# Altium PCB PWM Buck SW.PcbDoc
Units mm, origin at the board's own origin, x right, y up, seen from the top; angles counter-clockwise.
Board outline 156.03 x 124.28 mm, 2 copper layers (Top Layer, Bottom Layer); 37 components, 29 nets, 112 pads, 0 vias.
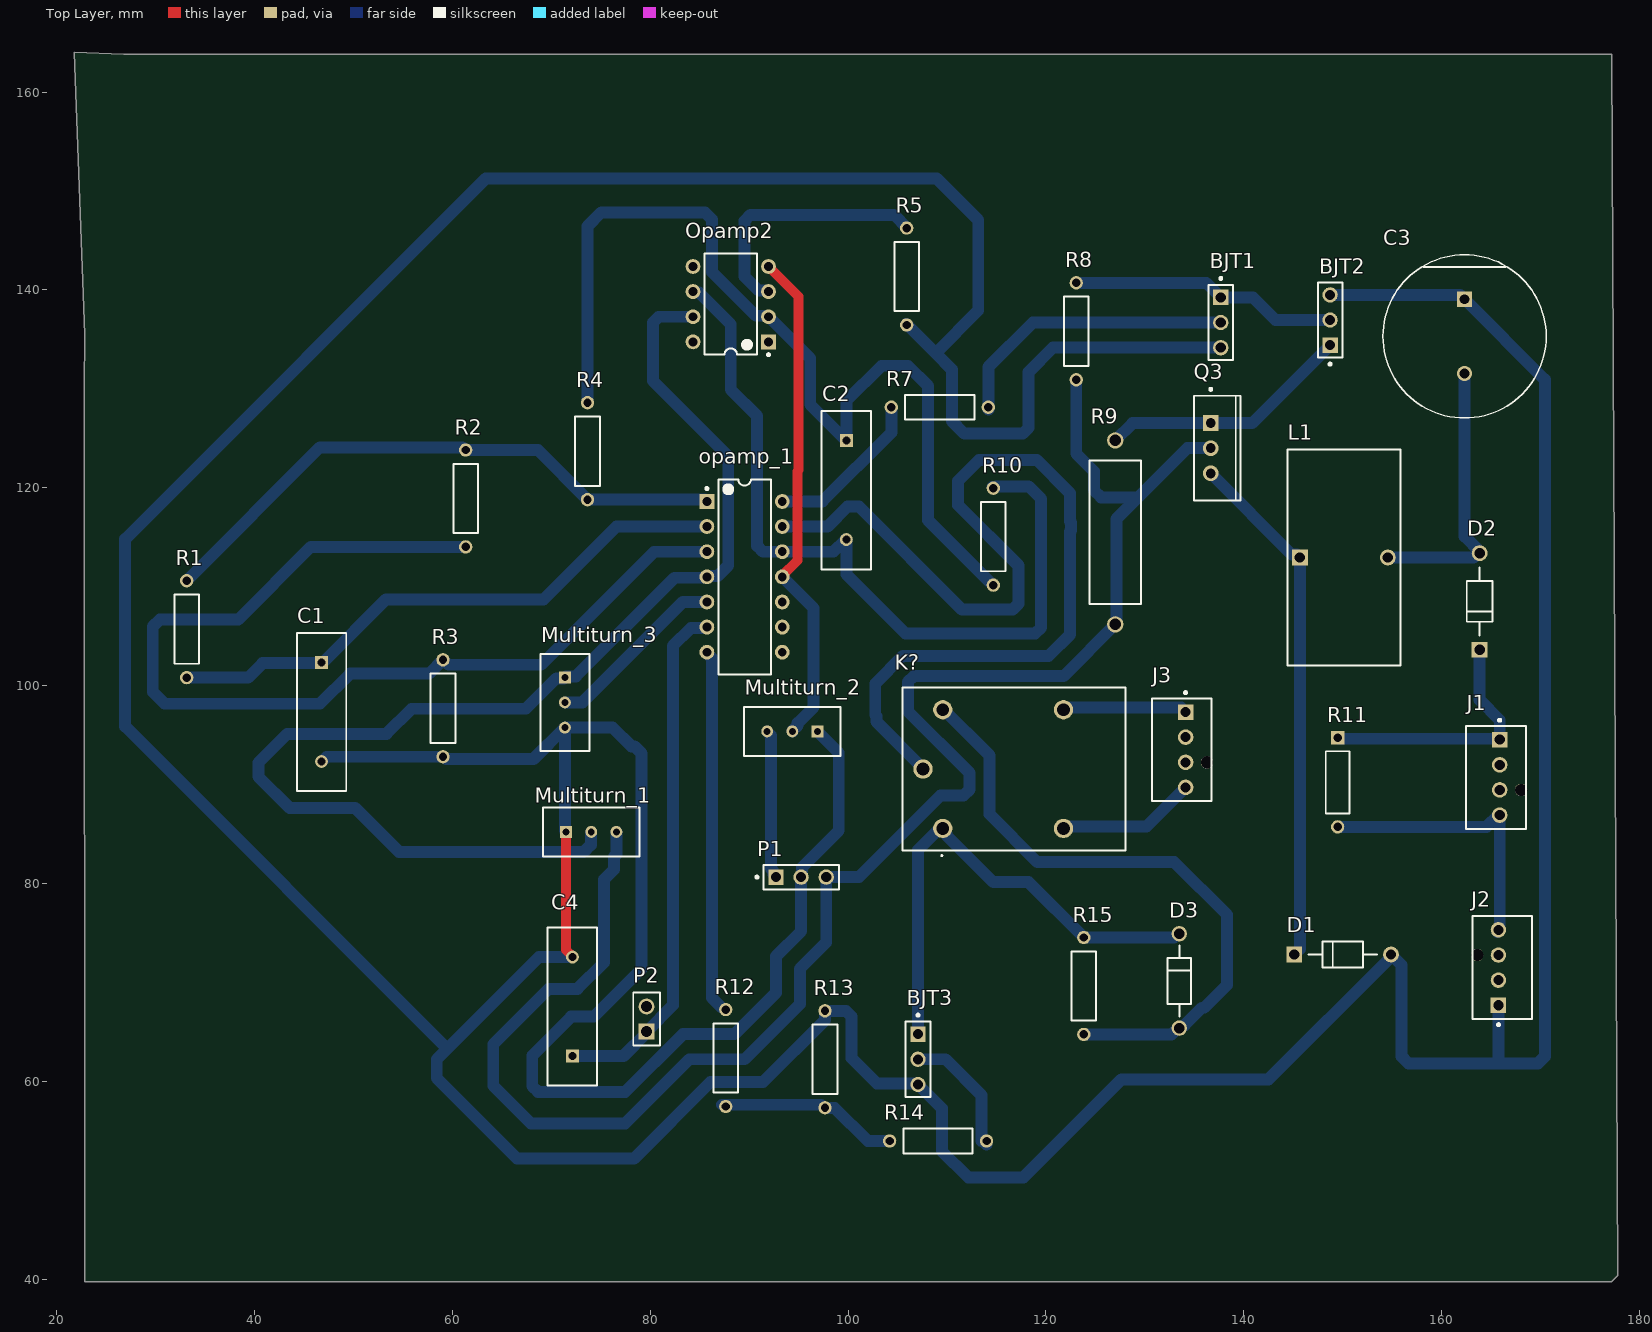
[diagram p0: Top Layer view]
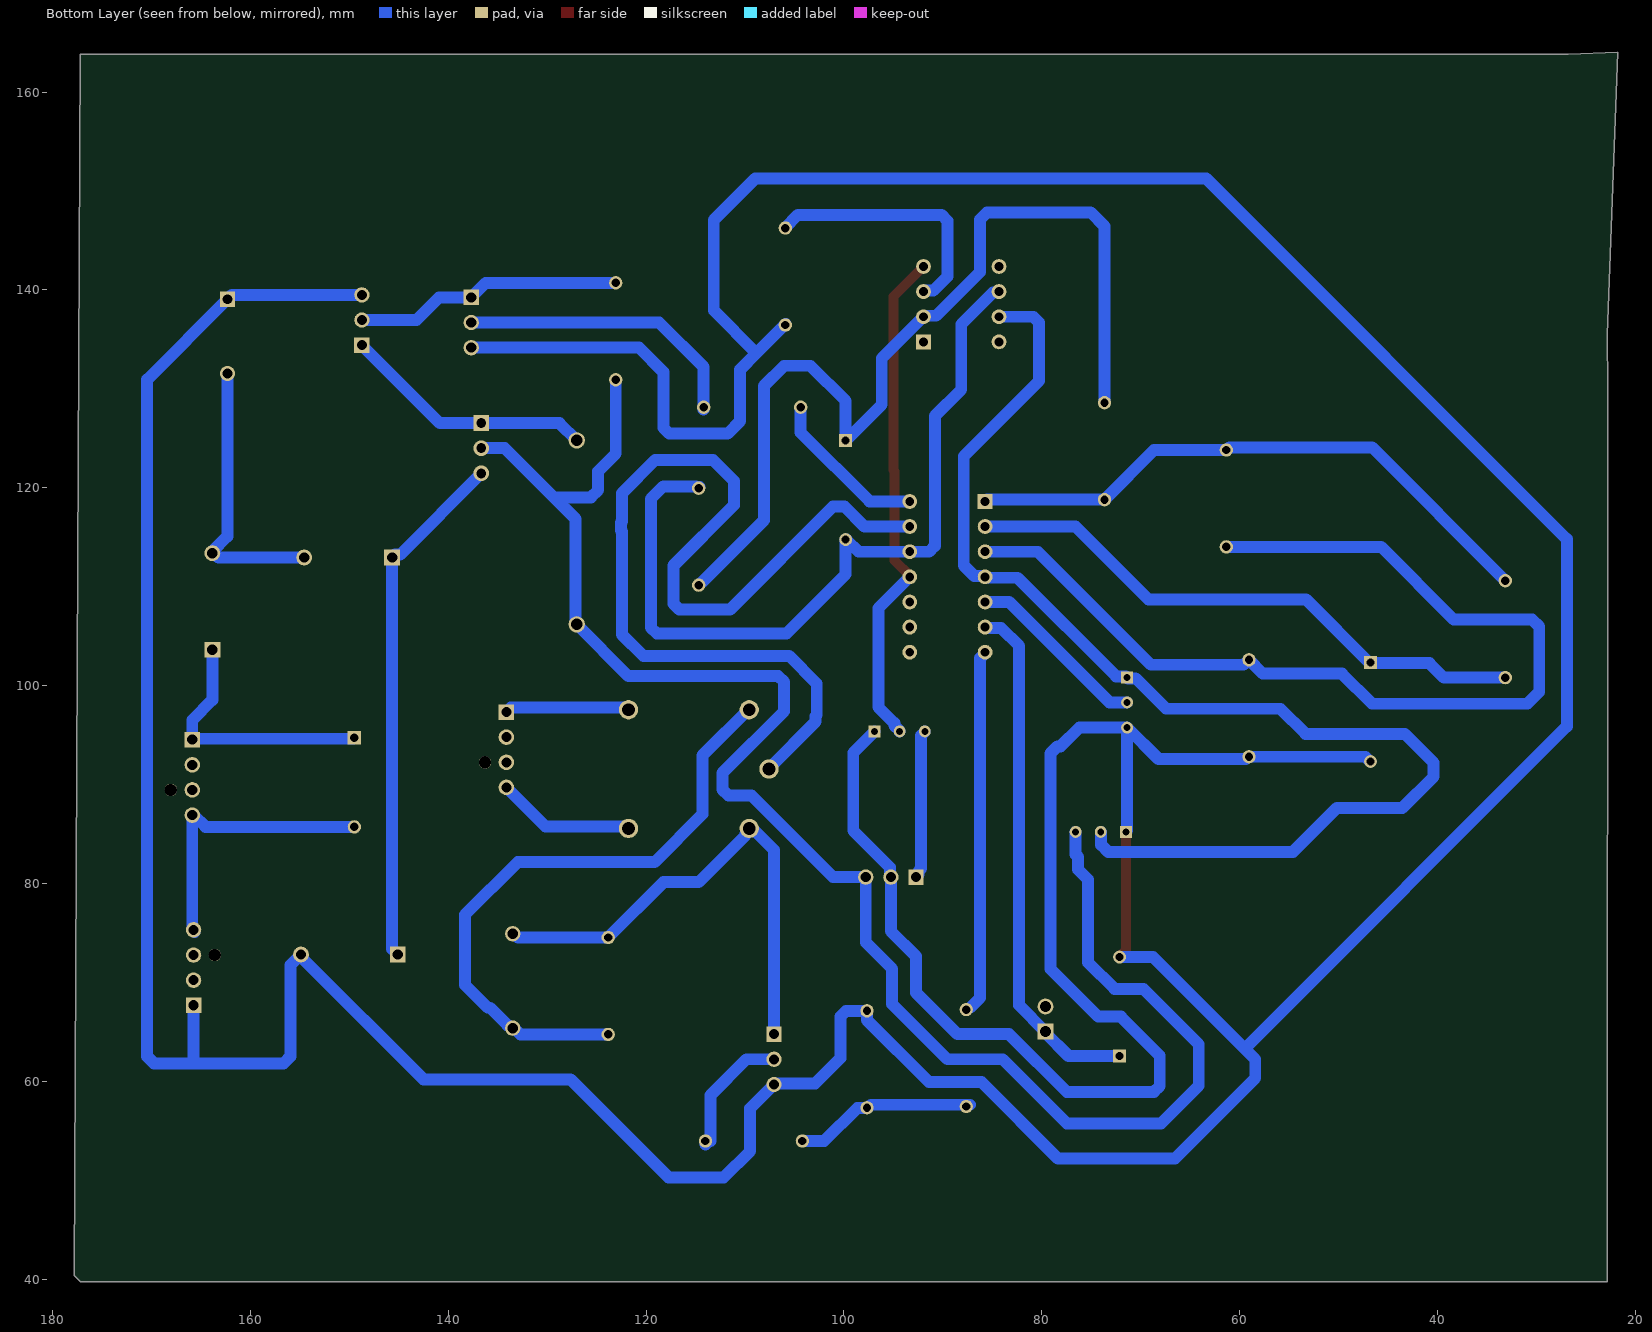
[diagram p1: Bottom Layer view, seen from below]
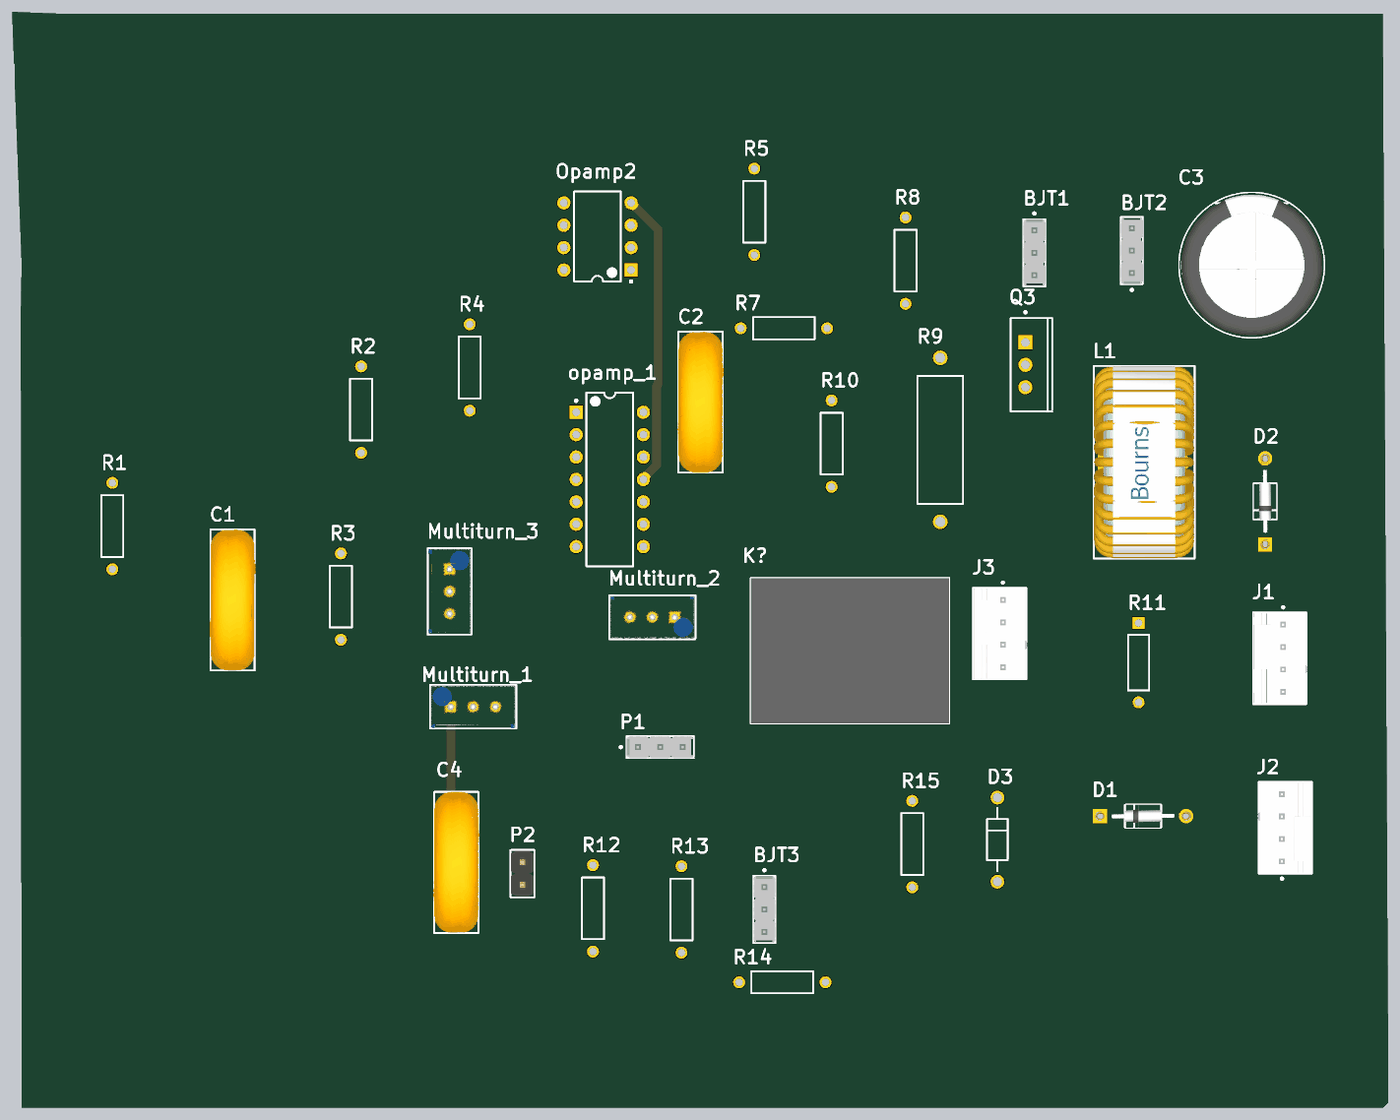
[diagram p2: 3D render of the assembled board from above, using the file's embedded part models]

## Layer stack, top to bottom
Top Solder: solder mask 0.0102, Solder Resist, Dk 3.5
Top Layer: signal copper 0.0356
Dielectric 1: dielectric 0.32, FR-4, Dk 4.8
Bottom Layer: signal copper 0.0356
Bottom Solder: solder mask 0.0102, Solder Resist, Dk 3.5

## Board outline
22.77,130.085 22.86,135.471 21.774,164.027 26.797,163.83 177.165,163.83 177.8,40.386 177.165,39.751 22.86,39.751

## Design rules (kind name [scope] priority, off if disabled: settings)
Clearance [All] p1: gap=0 ignorepadtopadclearanceinfootprint=FALSE
PolygonConnect [All] p1: connectstyle=Relief reliefconductorwidth=0.254 reliefentries=4 polygonreliefangle="90 Angle" airgapwidth=0.254
RoutingVias [All] p1: holewidth=0.711 width=1.27 viastyle="Through Hole" minholewidth=0.711 minwidth=1.27 maxholewidth=0.711 maxwidth=1.27
SolderMaskExpansion [All] p1: expansion=0.102 istentingtop=FALSE
Width [All] p1: maxlimit=1 minlimit=1 preferedwidth=1 minimp=50.000000 maximp=50.000000 favimp=50.000000
30 further rules are at their usual default settings.

## Components (designator, comment, footprint, x,y, rotation, side; value= is the part's Value field where it differs from the comment)
BJT1 "22-28-4033" MOLX-22-28-4033_V 137.668,136.7 r270 top
BJT2 "22-28-4033" MOLX-22-28-4033_V 148.717,136.954 r90 top
BJT3 "22-28-4033" MOLX-22-28-4033_V 107.061,62.23 r270 top
C1 "10nF" FP-VY1472M63Y5UQ6TV0-MFG 46.774,97.329 r270 top
C2 "10nF" FP-VY1472M63Y5UQ6TV0-MFG 99.822,119.761 r270 top
C3 "100 u" FP-RAD-TH-D_16_0_5-L_25_2-MFG 162.306,135.303 r270 top
C4 "10nF" FP-VY1472M63Y5UQ6TV0-MFG 72.136,67.564 r90 top
D1 "" FP-6_561-5001_02-4-MFG 149.987,72.819 r0 top
D2 "" FP-6_561-5001_02-4-MFG 163.83,108.506 r90 top
D3 "1N4001" ONSC-AXIAL_LEAD-2-59-10_P 133.477,70.152 r270 top
J1 "" FP-47053-3000-MFG 165.482,90.726 r90 top
J2 "" FP-47053-3000-MFG 166.115,71.501 r270 top
J3 "" FP-47053-3000-MFG 133.732,93.52 r90 top
K? "T7NS5D4-24" T7NS5D424 109.569,85.567 r0 top
L1 "2114-V-RC" FP-2114-V-RC-MFG 150.114,112.951 r90 top value=150uH
Multiturn_1 "" FP-3296W-MFG 74.041,85.222 r270 top
Multiturn_2 "" FP-3296W-MFG 94.361,95.372 r90 top
Multiturn_3 "" FP-3296W-MFG 71.379,98.298 r180 top
Opamp2 "UA741CP" P0008A 88.138,138.557 r180 top
opamp_1 "LM324N" N0014A 89.535,110.998 r0 top
P1 "22-28-4033" MOLX-22-28-4033_V 95.25,80.645 r0 top
P2 "" 61300211121 79.629,66.294 r90 top
Q3 "IRFB31N20DPBF" INTR-TO-220AB-3 136.652,124 r0 top
R1 "33k" OMTE-RES7X2.5-2 33.147,105.712 r270 top
R2 "33k" OMTE-RES7X2.5-2 61.341,118.92 r270 top
R3 "33k" OMTE-RES7X2.5-2 59.055,97.711 r270 top
R4 "1.2k" OMTE-RES7X2.5-2 73.66,123.698 r270 top
R5 "OD103JE" OMTE-RES7X2.5-2 105.918,141.351 r270 top
R7 "1 k" OMTE-RES7X2.5-2 109.273,128.143 r0 top
R8 "1 k" OMTE-RES7X2.5-2 123.063,135.811 r270 top
R9 "1.2K" RESA90-1450X520 127,115.491 r270 top
R10 "33k" OMTE-RES7X2.5-2 114.681,115.062 r90 top
R11 "1K" RESA60-630X240 149.479,90.218 r270 top
R12 "10 K" OMTE-RES7X2.5-2 87.63,62.357 r90 top
R13 "10 K" OMTE-RES7X2.5-2 97.663,62.23 r270 top
R14 "1 k" OMTE-RES7X2.5-2 109.093,53.975 r0 top
R15 "10 k" OMTE-RES7X2.5-2 123.825,69.644 r270 top

## Footprints (in the part's own frame and the unit in brackets; to place one, negate y for a bottom-side part, rotate by r counter-clockwise, add the part's x,y. Pads: shape width x height; smd on the part's side, far side on the other; paste and mask are expansions set on the pad)
61300211121 [mm] "Pin Header, pitch 2.54 mm, THT, Vertical, single row, 2p"
  rect 1.6x1.6 hole 1.1: 1(-1.27,0)
  round 1.6 hole 1.1: 2(1.27,0)
  silkscreen extent -2.69,-1.35 2.69,1.35, body extent -2.54,-1.27 2.54,1.27, height 8.57
FP-6_561-5001_02-4-MFG [mm]
  rect 1.6x1.6 hole 1.05 paste-1000 mask+0: 1(-4.888,0)
  round 1.6 hole 1.05 paste-1000 mask+0: 2(4.888,0)
  silkscreen extent -3.45,-1.3 3.45,1.3, body extent -5.79,-1.4 5.79,1.4, height 0.25
FP-2114-V-RC-MFG [mm]
  rect 1.6x1.6 hole 1.05 paste-1000 mask+0: 1(0,4.445)
  round 1.6 hole 1.05 paste-1000 mask+0: 2(0,-4.445)
  silkscreen extent -10.92,-5.72 10.92,5.72, body extent -11.02,-5.81 11.02,5.81, height 0.25
FP-3296W-MFG [mm]
  rect 1.2x1.2 hole 0.7 paste-1000 mask+0: 1(0.005,-2.54)
  round 1.2 hole 0.7 paste-1000 mask+0: 2(0.005,0) 3(0.005,2.54)
  silkscreen extent -2.48,-4.89 2.48,4.89, body extent -2.58,-4.99 2.58,4.99, height 0.25
FP-47053-3000-MFG [mm]
  rect 1.57x1.57 hole 1.02 paste-1000 mask+0: 1(3.81,-0.38)
  round 1.57 hole 1.02 paste-1000 mask+0: 2(1.27,-0.38) 3(-1.27,-0.38) 4(-3.81,-0.38)
  round 1.25 hole 1.25 unplated paste-1000 mask+0: ""(-1.27,-2.54)
  silkscreen extent -5.2,-3.02 5.9,3.02, body extent -5.3,-3.26 5.3,3.12, height 0.25
FP-RAD-TH-D_16_0_5-L_25_2-MFG [mm]
  rect 1.55x1.55 hole 1 paste-1000 mask+0: 1(-3.75,0)
  round 1.55 hole 1 paste-1000 mask+0: 2(3.75,0)
  silkscreen extent -8.25,-8.25 8.25,8.25, body extent -8.35,-8.35 8.35,8.35, height 0.25
FP-VY1472M63Y5UQ6TV0-MFG [mm]
  rect 1.3x1.3 hole 0.8 paste-1000 mask+0: 1(-5,0)
  round 1.3 hole 0.8 paste-1000 mask+0: 2(5,0)
  silkscreen extent -8,-2.5 8,2.5, body extent -8.1,-2.6 8.1,2.6, height 0.25
INTR-TO-220AB-3 [mm] "FM, 3-Leads, Body 10.55x4.7mm, Pitch 2.54mm"
  rect 1.6x1.6 hole 1: 1(0,2.54)
  round 1.6 hole 1: 2(0,0) 3(0,-2.54)
  silkscreen extent -1.67,-5.3 3.03,6.07, body extent -1.67,-5.28 3.03,5.28, height 19.3
MOLX-22-28-4033_V [mm] "THD, 3-Leads, Body 7.62x2.49mm, Pitch 2.54mm"
  rect 1.55x1.55 hole 1.02: 1(-2.54,0)
  round 1.55 hole 1.02: 2(0,0) 3(2.54,0)
  silkscreen extent -4.58,-1.24 3.81,1.24, body extent -3.81,-1.24 3.81,1.24, height 8.38
N0014A [mm] "DIP, 14-Leads, Body 19.7x6.6mm, Pitch 2.54mm"
  rect 1.5x1.5 hole 0.9: 1(-3.81,7.62)
  round 1.5 hole 0.9: 2(-3.81,5.08) 3(-3.81,2.54) 4(-3.81,0) 5(-3.81,-2.54) 6(-3.81,-5.08) 7(-3.81,-7.62) 8(3.81,-7.62) 9(3.81,-5.08) 10(3.81,-2.54) 11(3.81,0) 12(3.81,2.54) 13(3.81,5.08) 14(3.81,7.62)
  silkscreen extent -3.93,-9.85 2.65,9.85, body extent -3.95,-9.85 3.95,9.85, height 5.08
OMTE-RES7X2.5-2 [mm] "Resistor, Axial; Body 7x2.5mm, Lead Dia. 0.6mm"
  round 1.35 hole 0.85: 1(-4.9,0) 2(4.9,0)
  silkscreen extent -3.5,-1.25 3.5,1.25, body extent -3.5,-1.25 3.5,1.25, height 2.5
ONSC-AXIAL_LEAD-2-59-10_P [mm] "AXIAL, 2-Leads, Diameter 2.35mm"
  round 1.55 hole 1.05: 1(-4.77,0) 2(4.77,0)
  silkscreen extent -3.59,-1.17 3.59,1.17
P0008A [mm] "DIP, 8-Leads, Body 10.15x6.6mm, Pitch 2.54mm"
  rect 1.5x1.5 hole 0.9: 1(-3.81,3.81)
  round 1.5 hole 0.9: 2(-3.81,1.27) 3(-3.81,-1.27) 4(-3.81,-3.81) 5(3.81,-3.81) 6(3.81,-1.27) 7(3.81,1.27) 8(3.81,3.81)
  silkscreen extent -3.94,-5.1 2.65,5.23, body extent -3.95,-5.07 3.95,5.07, height 5.08
RESA60-630X240 [mm] "Axial Resistor, 2-Leads, Dia 2.4mm, Body Length 6.3mm"
  rect 1.35x1.35 hole 0.85: 1(-4.5,0)
  round 1.35 hole 0.85: 2(4.5,0)
  silkscreen extent -3.15,-1.2 3.15,1.2, body extent -3.15,-1.2 3.15,1.2, height 2.4
RESA90-1450X520 [mm] "THD, 2-Leads, Dia 5.2mm, Body Length 14.5mm"
  round 1.65 hole 1.15: 1(-9.3,0) 2(9.3,0)
  silkscreen extent -7.25,-2.6 7.25,2.6, body extent -7.25,-2.6 7.25,2.6, height 5.2
T7NS5D424 [mm]
  round 1.95 hole 1.3: 11(-2,6) 12(12.2,12) 14(12.2,0) A1(0,0) A2(0,12)
  silkscreen extent -4.05,-2.8 18.45,14.25, body extent -4.05,-2.25 18.45,14.25, height 17

## Part data
BJT1 BJT2 BJT3 P1: library part CMP-1676-00001-5, "Male Header, Pitch 2.54 mm, 1 x 3 Position, Height 8.38 mm, Tail Length 3.18 mm, RoHS, Bulk", Colour=Black, Current Rating="4 A", Manufacturer=Molex, Max Operating Temperature="75 degC", Min Operating Temperature="0 degC", Package Quantity=1, Voltage Rating="250 V", ComponentLink1Description="Manufacturer URL", ComponentLink1URL=http://www.molex.com/, ComponentLink2Description=Datasheet, ComponentLink2URL=http://www.molex.com/pdm_docs/sd/022284033_sd.pdf, Contact Finish=Gold, Contact Material=Brass, Contact Plating=Gold, DatasheetVersion="Rev. G, 01/2012", Height="8.38 mm", Lead Pitch="0.1 inch", Length="7.62 mm", Mount="Through Hole", Mounting Technology="Through Hole", PackageDescription="Male Header, Pitch 2.54 mm, 1 x 3 Position, Height 8.38 mm, Tail Length 3.18 mm", PackageReference=22-28-4033, Packaging=Bulk, Pins=3, REACH SVHC=Unknown, RoHSCompliant=true, Rows=1
C1 C2 C4: library part CMP-02417-000050-1, "CAP CER 4700PF 760VAC Y5U RADIAL", Capacitance=4.7nF, Case/Package=Radial, Dielectric=Y5U, Max Operating Temperature=125°C, Min Operating Temperature=-40°C, Package Quantity=500, Resistor Type=Ceramic, Tolerance=20%, Voltage=500V, Construction=RADIAL, Contact Plating=Tin, Depth=5mm, Diameter=16mm, Height=19mm, Height - Seated (Max)=0.787inch, Lead Diameter=0.6mm, Lead Pitch=10mm, Lead/Base Style=Kinked, Mount="Through Hole", Packaging="Tape and Reel", Radiation Hardening=No, RoHS Compliant=Yes, Series=VY1, Termination=Radial, Thickness=5mm, Voltage Rating (AC)=500V, Voltage Rating (DC)=500V
C3: library part CMP-05427-000487-1, "Aluminum Electrolytic Capacitors (Radial Lead Type) 1000uF ±20% 50V", Capacitance=1mF, Case/Package=Radial, ESR (Equivalent Series Resistance)=16mR, Max Operating Temperature=105°C, Min Operating Temperature=-40°C, Package Quantity=250, Ripple Current=3.32A, Tolerance=20%, Voltage Rating=50V, Contact Plating=Tin, Diameter=16mm, Features="General Purpose", Height=25mm, Height - Seated (Max)=0.984inch, Impedance=16mR, Lead Diameter=0.8mm, Lead Free="Lead Free", Lead Pitch=7.5mm, Length=25mm, Life (Hours)=10000Hour, Mount="Through Hole", Number of Pins=2, Packaging="Tape and Reel", Polarity=Polar, Radiation Hardening=No, REACH SVHC="No SVHC", RoHS Compliant=Yes, Series=FR, Termination="Through Hole", Voltage Rating (DC)=50V
D1 D2: library part CMP-02541-000001-1, "DIODE ZENER 15V 1.3W DO41", Manufacturer=Vishay, Manufacturer Part Number=BZX85C15-TAP, Max Junction Temp=+175°C, Max Reverse Leakage Current=0.5uA, Max Zener Voltage=15.6V, Nom Zener Voltage=15V, Package=6.561-5001.02-4, Power Dissipation=1300mW, Reverse Voltage=11V, Temperature="to +175°C", Automotive=Yes, Automotive Grade="Grade 0", Category=Diode, ComponentLink2Description=Datasheet, ComponentLink2URL=http://www.vishay.com/docs/85607/bzx85.pdf, Device Class L1="Discrete Semiconductors", Device Class L2=Diodes, Device Class L3="Zener Diodes", Digikey Description="DIODE ZENER 15V 1.3W DO41", Height=2.6mm, Lead Free=Yes, Mouser Description="Zener Diodes 15 Volt 1.3 Watt 5%", Octopart=https://octopart.com/bzx85c15-tap-vishay-55401762, RoHS=TRUE, Temperature Range High=+175°C, Zener Impedance=15Ω
D3: library part CMP-0902-00204-1, "Standard Recovery Rectifier, 2-Pin Axial_Lead, Pb-Free, Tape and Reel", Manufacturer="On Semiconductor", PartNumber=1N4001RLG, ComponentLink1Description="Manufacturer URL", ComponentLink1URL=http://www.onsemi.com/, ComponentLink2Description=Datasheet, ComponentLink2URL=http://www.onsemi.com/pub_link/Collateral/1N4001-D.PDF, ComponentLink3Description="Package Specification", ComponentLink3URL=http://www.onsemi.cn/pub_link/Collateral/59-10.PDF, DatasheetVersion="Rev. 13", IFSM Max (A)=30, IO(rec) Max (A)=1, Mounting Technology="Through Hole", PackageDescription="2-Pin, Axial Lead, Diameter 2.35 mm", PackageReference=AXIAL_LEAD-2-59-10, PackageVersion="Rev. U, 02/2005", Packing="Tape and Reel", RoHS=TRUE, Type="Standard Recovery", VRRM Max (V)=50
J1 J2 J3: library part CMP-04776-000447-1, "CONN HEADER VERT 4POS 2.54MM", Current Rating=4A, Max Operating Temperature=75°C, Min Operating Temperature=0°C, Package Quantity=12000, Voltage Rating=250V, Contact Material="Copper Alloy", Contact Plating=Tin, Gender=Male, Glow Wire Compliant=Non-compliant, Halogen Free="Low Halogen", Mount="Through Hole", Number of Circuits=4, Number of Contacts=4, Number of Positions=4, Number of Rows=1, Orientation=Straight, Packaging=Bulk, Pitch=2.54mm, REACH SVHC="No SVHC", RoHS Compliant=Yes, Series=47053, Termination="Through Hole"
K?: "Relay or Contactor", Manufacturer_Name="TE Connectivity", Datasheet Link=https://componentsearchengine.com/Datasheets/2/T7NS5D4-24.pdf, Height=16.9mm, Manufacturer_Part_Number=T7NS5D4-24
L1: library part CMP-07248-000012-1, "FIXED IND 150UH 3.4A 62 MOHM TH", Inductance=150uH, Manufacturer=Bourns, Rms Current=3.4A, Series Resistance=0.062Ω, Temperature="-55°C to +105°C", Temperature Range High=+105°C, Temperature Range Low=-55°C, Test Frequency=1kHz, Tolerance=15%, Automotive=No, Category=Ind, ComponentLink2Description=Datasheet, ComponentLink2URL=https://www.bourns.com/docs/Product-Datasheets/2100_series.pdf, Composition=Wirewound, Device Class L1="Passive Components", Device Class L2=Inductors, Device Class L3="Fixed Inductors", Digikey Description="FIXED IND 150UH 3.4A 62 MOHM TH", Height=0.86inch, Lead Free=Yes, Manufacturer Part Number=2114-V-RC, Mouser Description="Fixed Inductors 150uH 15% Vertical", Octopart=https://octopart.com/2114-v-rc-bourns-39574085, Package=2114-V-RC, RoHS=TRUE, Shielding=true
Multiturn_1 Multiturn_2 Multiturn_3: library part CMP-07234-000043-1, "TRIMMER 50K OHM 0.5W PC PIN TOP", Color=Blue, Insulation Resistance=1GR, Manufacturer Series=3296, Max Operating Temperature=125°C, Max Power Dissipation=500mW, Min Operating Temperature=-55°C, Package Quantity=50, Resistance=50kR, Resistance Law=Linear, Resistance Tolerance=10%, Resistor Type=Cermet, Temperature Coefficient=100ppm/°C, Actuator Orientation=Vertical, Actuator Type=SCREW, Contact Plating=Tin, Depth=4.83mm, Height=0.395inch, Lead Free="Lead Free", Length=9.53mm, Military Standard=Not, Mount=Panel, Number of Pins=3, Number of Terminals/Pins=3, Number of Turns=25, Packaging=Rail/Tube, Power Rating=500mW, Radiation Hardening=No, REACH SVHC="No SVHC", RoHS Compliant=Yes, Series=3296, Taper=Linear, Technology=CERMET, Terminal Finish=Tin, Termination=Pin, Tolerance=10%, Type=Potentiometer, Weight=0.03oz, Width=9.53mm
Opamp2: library part CMP-0017-00973-2, "General-Purpose Operational Amplifier, 7 to 36 V, 0 to 70 degC, 8-pin DIP (P8), Pb-Free (RoHS)", Manufacturer="Texas Instruments", Total Supply Voltage(Max)(+5V is 5, +/-5V is 10)=36, Total Supply Voltage(Min)(+5V is 5, +/-5V is 10)=7, CMRR(Min)(dB)=70, Code_JEDEC=MS-001, ComponentLink1Description="Manufacturer URL", ComponentLink1URL=http://www.ti.com/, ComponentLink2Description=Datasheet, ComponentLink2URL=http://www.ti.com/lit/ds/symlink/ua741.pdf, ComponentLink3Description="Package Specification", ComponentLink3URL=http://www.ti.com/litv/pdf/mpdi001b, DatasheetVersion=SLOS094B, Eco-Plan="Pb-Free (RoHS)", GBW(Typ)(MHz)=1, IIB(Max)(pA)=800000, Iq per channel(Max)(mA)=2.8, Mounting Technology="Through Hole", Number of Channels=1, PackageDescription="8-Pin Plastic In-Line, Body 9.59 x 6.35 mm, Pitch 2.54 mm", PackageReference=P0008A, PackageVersion="4040082/E, 04/2010", PartNumber=UA741CP, Slew Rate(Typ)(V/us)=0.5, Sub Family="General Purpose Amplifier, High Supply Voltage Amplifier (>=30V)", Vio (25C)(Max)(mV)=6
opamp_1: library part CMP-0055-00082-3, "Low Power Quad Operational Amplifier, 14-pin MDIP", Manufacturer="Texas Instruments", Package Reference=N0014A, PackageTopMarking=NSUZXYYTTE#*LM324N, PowerWise=N, Code_JEDEC=MS-001-AA, ComponentLink1Description="Datasheet URL", ComponentLink1URL=http://www.ti.com/general/docs/lit/getliterature.tsp?genericPartNumber=LM324&fileType=pdf, CompType=Amplifiers, PackageDescription="MDIP, .750 x .250 x.130in, 14 Lead, .100in Pitch", PinCount=14, RoHS=N
P2: library part CMP-1712-00002-4, "THT Vertical Pin Header WR-PHD, Pitch 2.54 mm, Single Row, 2 pins", Contact Resistance=20mOhm, Manufacturer="Wurth Elektronik", Operating Temperature=-40to105degC, Package Reference=61300211121, Rated Current=3A, Withstanding Voltage=500VAC, Working Voltage=250VAC, Datasheet URL=https://katalog.we-online.de/em/datasheet/6130xx11121.pdf, Gender=Male, Manufacturer URL=http://www.we-online.de, Mounting Technology=THT, Orientation=Vertical, Packaging=Bag, Part Number=61300211121, Pin Number=2, Pitch=2.54mm, Publisher=WurthElektronik, Row Number=Single
Q3: library part CMP-2000-06468-1, "HEXFET(R) Power MOSFET, 200 V, 31 A, 82 mOhm, -55 to 175 degC, 3-Pin FM (TO-220AB), RoHS, Tube", Capacitance, Input=2370pF@25V, Current, Drain=31A, Manufacturer="International Rectifier", Package Description="3-Pin Flange Mount, Body 4.445 x 10.415 mm, Pitch 2.54 mm", Package Reference=TO-220AB, Power Dissipation=200W, Resistance, Drain to Source On=0.082Ω, Resistance, Thermal, Junction to Case=0.75°C/W, Temperature, Operating, Maximum=+175°C, Temperature, Operating, Minimum=-55°C, Temperature, Operating, Range=-55to+175°C, Voltage, Breakdown, Drain to Source=200V, Voltage, Diode Forward=1.3V, Voltage, Gate to Source=±30V, Brand/Series=HEXFET®Series, Channel Mode=Enhancement, Channel Type=N, Configuration=DualDrain, Datasheet URL=http://www.infineon.com/dgdl/irfb31n20dpbf.pdf?fileId=5546d462533600a40153561547951df1, Datasheet Version=01/2004, Dimensions=10.54x4.69x8.77mm, Gate Charge, Total=70nC, Height=8.77mm, Length=10.54mm, Manufacturer URL=http://internationalrectifier.com/, Mounting Technology=ThroughHole, Mounting Type=ThroughHole, Number of Elements per Chip=1, Number of Pins=3, Package Type=TO-220AB, Polarization=N-Channel, Time, Turn-Off Delay=26ns, Time, Turn-On Delay=16ns, Transconductance, Forward=17S, Typical Gate Charge @ Vgs=70nC@10V, Voltage, Drain to Source=200V, Voltage, Forward, Diode=1.3V, Width=4.69mm
R1 R2 R3 R4 R7 R8 R10 R12 R13 R14 R15: library part CMP-2000-06865-1, "Little Demon(R) Carbon Composition Molded OD Series, 250 V, 10 KOhm, +/-5%, -70 to 130 degC, 2-Pin THD, RoHS, Bulk", Manufacturer=Ohmite, Operating Temperature=-, Package / Case=Axial, Package Description="2-Pin THD Resistor, Body 7 x 2.5 mm, Lead Dia. 0.6 mm", Package Reference=RES7X2.5, PartNumber=OD103JE, Power (Watts)=0.25W,1/4W, Power Rating=0.25W, Resistance (Ohms)=10k, Standard Package=100, Tolerance=±5%, Catalog Drawings=OD,OF,OASeries, Category=Resistors, Composition=CarbonComposition, Datasheet URL=http://www.ohmite.com/cat/res_od_of_oa.pdf, Datasheet Version=06/2016, EDA / CAD Models=DownloadfromAcceleratedDesigns, Family=ThroughHoleResistors, Features=PulseWithstanding, Height=-, Manufacturer URL=http://www.ohmite.com/, Mounting Technology=ThroughHole, Number of Terminations=2, Online Catalog=OD,OF,OASeries,LittleDemon®, Packaging=Bulk, RoHS Information="LittleDemon\"E\"SeriesMaterialDeclaration", Series=LittleDemon®OD, Size / Dimension="0.098\"Diax0.276\"L(2.50mmx7.00mm)", Supplier Device Package=Axial, Temperature Coefficient=-
R5: library part CMP-2000-06865-1, "Little Demon(R) Carbon Composition Molded OD Series, 250 V, 10 KOhm, +/-5%, -70 to 130 degC, 2-Pin THD, RoHS, Bulk", Manufacturer=Ohmite, Operating Temperature=-, Package / Case=Axial, Package Description="2-Pin THD Resistor, Body 7 x 2.5 mm, Lead Dia. 0.6 mm", Package Reference=RES7X2.5, Power (Watts)=0.25W,1/4W, Power Rating=0.25W, Resistance (Ohms)=10k, Standard Package=100, Tolerance=±5%, Catalog Drawings=OD,OF,OASeries, Category=Resistors, Composition=CarbonComposition, Datasheet URL=http://www.ohmite.com/cat/res_od_of_oa.pdf, Datasheet Version=06/2016, EDA / CAD Models=DownloadfromAcceleratedDesigns, Family=ThroughHoleResistors, Features=PulseWithstanding, Height=-, Manufacturer URL=http://www.ohmite.com/, Mounting Technology=ThroughHole, Number of Terminations=2, Online Catalog=OD,OF,OASeries,LittleDemon®, Packaging=Bulk, PartNumber=OD103JE, RoHS Information="LittleDemon\"E\"SeriesMaterialDeclaration", Series=LittleDemon®OD, Size / Dimension="0.098\"Diax0.276\"L(2.50mmx7.00mm)", Supplier Device Package=Axial, Temperature Coefficient=-
R9: library part CMP-1678-00001-6, "Axial Resistor, 25 mOhm, +/- 1%, 3 W, -55 to 275 degC, 2-Pin THD, RoHS, Bulk", Manufacturer=Ohmite, Max Operating Temperature="275 degC", Min Operating Temperature="-55 degC", Package Quantity=10, Voltage Rating="100 mV", ComponentLink1Description="Manufacturer URL", ComponentLink1URL=http://www.ohmite.com/, ComponentLink2Description=Datasheet, ComponentLink2URL=http://www.ohmite.com/cat/res_10.pdf, DatasheetVersion=06/2015, Length="14.5 mm", Mount="Through Hole", Mounting Technology="Through Hole", PackageDescription="2-Pin Axial Lead, Dia 5.2 mm, Body Length 14.5 mm", PackageReference="Axial Resistor", Packaging=Bulk, Pins=2, REACH SVHC=Unknown, RoHSCompliant=true
R11: library part CMP-1659-00073-1, "Axial Resistor, 100 KOhm, +/- 1%, 0.25 W, -55 to 155 degC, 2-Pin THD, RoHS, Bulk", Case\Package=Axial, Max Operating Temperature="155 degC", Min Operating Temperature="-55 degC", Package Quantity=200, Power Rating="250 mW", Resistance="475 Ohm", Tolerance=1%, Voltage Rating="250 V", ComponentLink1Description="Manufacturer URL", ComponentLink1URL=http://www.yageo.com/, ComponentLink2Description=Datasheet, ComponentLink2URL=http://www.yageo.com/documents/recent/Yageo%20LR_MFR_2013.pdf, DatasheetVersion=Apr-13, Length="0.248 inch", Mount="Through Hole", PackageDescription="2-Pin Axial Lead, Dia 2.4 mm, Body Length 6.3 mm", PackageReference=MFR-25, Packaging=Bulk, RoHSCompliant=true

## Nets (pads, with @x,y where several pads share a name; then routed paths per layer and width w, separated by ;. In a path a pad name is that pad's centre, name@x,y a point inside that pad or via, vN(x,y) a via of type N, cw(c..) or ccw(c..) an arc to the next point about the centre after c; other vN are vias at no path point)
"+15 V": Multiturn_1.2 Multiturn_3.1 Opamp2.7 opamp_1.4 | length 127.4
  Bottom Layer w1.2: Multiturn_3.1 71.274,100.738 70.512,100.738 67.437,97.663 55.88,97.663 53.34,95.123 43.307,95.123 40.386,92.202 40.386,90.805 43.561,87.63 50.165,87.63 54.61,83.185 73.279,83.185 74.003,83.909 74.003,85.179 Multiturn_1.2 ; Multiturn_3.1@71.474,100.938 72.49,100.938 82.454,110.902 85.629,110.902 85.808,111.081 86.824,111.081 87.884,112.141 87.884,123.19 80.264,130.81 80.264,136.701 80.85,137.287 Opamp2.7
"+30 V": Multiturn_1.3 P1.3 Q3.2 R8.2 R9.2 | length 178.5
  Bottom Layer w1.2: Multiturn_1.3 76.581,82.931 76.327,82.677 76.327,81.407 75.311,80.391 75.311,72.009 72.644,69.342 69.723,69.342 64.135,63.754 64.135,59.563 67.945,55.753 77.47,55.753 83.947,62.23 89.535,62.23 95.123,67.818 95.123,71.374 97.79,74.041 P1.3 101.092,80.645 109.347,88.9 111.682,88.9 112.268,89.486 112.268,91.186 106.045,97.409 106.045,100.379 106.631,100.965 121.774,100.965 R9.2 ; R8.2 123.063,123.444 124.841,121.666 124.841,119.761 125.57,119.032 129.308,119.032 ; R9.2@127.127,106.494 127.127,116.851 129.308,119.032 ; Q3.2 134.276,124 129.308,119.032
"-15 V": Multiturn_2.2 Opamp2.4 opamp_1.11 | length 51.1
  Top Layer w1: Opamp2.4 94.996,139.319 94.996,121.793 94.869,121.666 94.869,112.656 93.345,111.132 opamp_1.11
  Bottom Layer w1.2: opamp_1.11 96.52,107.823 96.52,97.824 94.901,96.205 94.901,95.971 94.361,95.431 Multiturn_2.2
"-30 V": Multiturn_2.3 P1.1 | length 15.1
  Bottom Layer w1.2: Multiturn_2.3 91.821,95.323 92.202,94.942 92.202,81.506 92.435,81.273 92.435,80.92 P1.1
Buck_Converter: BJT1.2 R7.2 | length 29.7
  Bottom Layer w1.2: R7.2@114.173,127.889 R7.2 114.173,132.207 118.666,136.7 BJT1.2
GND: BJT1.3 BJT2.3 BJT3.3 C1.2 C3.1 C4.2 D1.2 J2.1 Multiturn_1.1 Multiturn_2.1 Multiturn_3.3 P1.2 R3.2 R5.2 R13.1 | length 659.8
  Top Layer w1: Multiturn_1.1 71.501,73.28 72.136,72.645 C4.2
  Bottom Layer w1.2: C1.2 46.801,92.329 47.283,92.811 R3.2@59.124,92.811 ; R3.2@59.15,92.811 59.378,92.583 68.199,92.583 Multiturn_3.3 ; Multiturn_1.1 71.374,85.344 Multiturn_3.3 ; C4.2 68.754,72.564 59.499,63.309 ; Multiturn_2.1 99.06,93.218 99.06,85.344 95.355,81.639 95.355,80.75 P1.2 95.25,75.184 92.71,72.644 92.71,68.961 88.519,64.77 83.312,64.77 77.47,58.928 68.658,58.928 68.072,59.514 68.072,62.611 72.009,66.548 74.295,66.548 79.121,71.374 79.121,93.14 78.408,93.853 78.105,93.853 76.2,95.758 Multiturn_3.3 ; R5.2@105.881,136.562 108.839,133.604 ; BJT1.3 120.698,134.16 118.237,131.699 118.237,126.062 117.651,125.476 111.76,125.476 110.49,126.746 110.49,131.953 108.839,133.604 ; BJT2.3 161.865,139.494 C3.1 170.434,130.925 170.434,62.514 169.731,61.811 165.735,61.811 ; D1.2@154.8,72.634 154.798,72.634 154.675,72.511 154.675,72.379 142.494,60.198 127.635,60.198 117.729,50.292 112.141,50.292 109.474,52.959 109.474,57.277 BJT3.3 106.956,59.795 102.892,59.795 100.356,62.331 100.356,66.544 99.771,67.13 R13.1 97.663,66.192 91.415,59.944 86.106,59.944 78.359,52.197 66.548,52.197 58.42,60.325 58.42,62.23 59.499,63.309 ; D1.2 155.938,71.756 155.938,62.514 156.64,61.811 165.735,61.811 ; J2.1 165.735,61.811 ; 59.499,63.309 26.924,95.885 26.924,114.808 63.373,151.257 108.966,151.257 113.157,147.066 113.157,137.922 108.839,133.604
NetBJT1_1: BJT1.1 BJT2.2 R8.1 | length 27.2
  Bottom Layer w1.2: R8.1 136.197,140.711 BJT1.1 140.922,139.24 143.208,136.954 BJT2.2
NetBJT2_1: BJT2.1 Q3.1 R9.1 | length 25.7
  Bottom Layer w1.2: R9.1 128.749,126.54 Q3.1 140.843,126.54 BJT2.1
NetBJT3_1: BJT3.1 D3.1 K?.A1 R15.1 | length 51.1
  Bottom Layer w1.2: BJT3.1 107.061,83.368 109.466,85.773 109.466,85.516 109.941,85.041 109.941,84.877 114.681,80.137 118.232,80.137 R15.1 132.95,74.544 133.328,74.922 D3.1
NetBJT3_2: BJT3.2 R14.2 | length 12.9
  Bottom Layer w1.2: BJT3.2 109.855,62.23 113.485,58.6 R14.2@113.485,53.975 ; R14.2@113.993,53.616 R14.2
NetC1_1: C1.1 opamp_1.2 R1.2 | length 58.9
  Bottom Layer w1.2: R1.2 39.345,100.812 40.815,102.282 46.863,102.282 53.293,108.712 69.215,108.712 76.581,116.078 opamp_1.2
NetC2_1: C2.1 Opamp2.2 R4.1 R10.1 | length 96.9
  Bottom Layer w1.2: R4.1 73.66,146.431 75.057,147.828 85.53,147.828 86.233,147.125 86.233,141.825 90.675,137.383 91.852,137.383 Opamp2.2 91.974,137.287 96.176,133.086 96.176,128.407 C2.1@99.672,124.911 ; C2.1 99.822,128.778 103.378,132.334 106.045,132.334 108.077,130.302 108.077,116.713 R10.1@114.395,110.395
NetC2_2: C2.2 Opamp2.6 opamp_1.12 R10.2 | length 82.8
  Bottom Layer w1.2: Opamp2.6 84.424,139.731 84.932,139.731 88.138,136.525 88.138,129.921 90.805,127.254 90.805,114.124 91.391,113.538 opamp_1.12 98.518,113.538 C2.2@99.741,114.761 ; C2.2 99.822,111.252 105.791,105.283 118.921,105.283 119.507,105.869 119.507,118.872 118.237,120.142 114.956,120.142 114.843,120.029 114.625,120.029 R10.2@114.572,120.082
NetC3_2: C3.2 D2.2 L1.2 | length 28.2
  Bottom Layer w1.2: L1.2 163.225,112.951 163.668,113.394 D2.2 163.83,113.556 162.306,115.08 C3.2
NetC4_1: C4.1 opamp_1.6 P2.1 | length 52.8
  Bottom Layer w1.2: C4.1 77.296,62.564 P2.1@79.629,64.897 ; P2.1 82.296,67.691 82.296,104.013 84.105,105.822 85.629,105.822 opamp_1.6
NetD1_1: D1.1 L1.1 Q3.3 | length 52.9
  Bottom Layer w1.2: Q3.3 144.861,113.251 145.369,113.251 L1.1 145.669,73.389 D1.1
NetD2_1: D2.1 J1.1 R11.1 | length 26.4
  Bottom Layer w1.2: R11.1 149.57,94.627 165.771,94.627 J1.1 165.862,96.52 163.83,98.552 D2.1
NetD3_2: D3.2 K?.A2 R15.2 | length 64.6
  Bottom Layer w1.2: K?.A2@109.466,97.773 114.3,92.939 114.3,86.995 119.126,82.169 132.969,82.169 138.303,76.835 138.303,69.746 135.994,67.437 135.763,67.437 133.983,65.657 133.901,65.657 133.626,65.382 133.328,65.382 132.69,64.744 R15.2
NetJ1_4: J1.4 J2.4 R11.2 | length 28.8
  Bottom Layer w1.2: R11.2 164.51,85.718 165.708,86.916 J1.4 165.862,75.512 165.609,75.259 J2.4@165.609,75.105
NetJ3_1: J3.1 K?.12 | length 12.6
  Bottom Layer w1.2: K?.12@121.666,97.773 133.669,97.773 J3.1
NetJ3_4: J3.4 K?.14 | length 14.1
  Bottom Layer w1.2: K?.14@121.666,85.773 130.175,85.773 J3.4
NetMultiturn_3_2: Multiturn_3.2 opamp_1.5 | length 18.6
  Bottom Layer w1.2: Multiturn_3.2 73.152,98.298 83.312,108.458 opamp_1.5
NetOpamp2_3: Opamp2.3 R5.1 | length 25.9
  Bottom Layer w1.2: Opamp2.3 91.852,139.923 90.963,139.923 89.535,141.351 89.535,146.988 90.121,147.574 104.648,147.574 R5.1@105.983,146.239
Netopamp_1_1: opamp_1.1 R1.1 R2.1 R4.2 | length 60.4
  Bottom Layer w1.2: R1.1 46.614,124.079 61.041,124.079 61.3,123.82 68.638,123.82 R4.2 85.545,118.798 opamp_1.1
Netopamp_1_3: opamp_1.3 R2.2 R3.1 | length 104.9
  Bottom Layer w1.2: R2.2 45.694,114.02 38.354,106.68 30.421,106.68 29.718,105.977 29.718,99.36 30.907,98.171 46.609,98.171 49.657,101.219 57.663,101.219 R3.1 59.096,102.611 59.599,102.108 68.961,102.108 80.391,113.538 opamp_1.3
Netopamp_1_7: opamp_1.7 R12.2 | length 36.6
  Bottom Layer w1.2: opamp_1.7 85.725,103.297 86.233,102.789 86.233,68.453 R12.2@87.249,67.437
Netopamp_1_14: opamp_1.14 R7.1 | length 16.5
  Bottom Layer w1.2: opamp_1.14 97.409,118.618 104.373,125.582 R7.1
NetR12_1: R12.1 R13.2 R14.1 | length 18.5
  Bottom Layer w1.2: R12.1@87.249,57.637 97.261,57.637 97.568,57.33 R13.2 97.692,57.301 98.655,57.301 101.981,53.975 R14.1
Switching_cct: K?.11 opamp_1.13 | length 104.3
  Bottom Layer w1.2: opamp_1.13 97.917,116.078 99.949,118.11 101.092,118.11 111.506,107.696 116.635,107.696 117.221,108.282 117.221,112.141 111.125,118.237 111.125,120.699 113.235,122.809 119.062,122.809 122.428,119.443 122.428,116.586 122.522,116.492 122.522,115.664 122.428,115.57 122.428,105.156 120.269,102.997 105.537,102.997 102.743,100.203 102.743,97.028 102.87,96.901 102.87,96.369 K?.11@107.466,91.773
pads on no net: J1. J1.2 J1.3 J2. J2.2 J2.3 J3. J3.2 J3.3 Opamp2.1 Opamp2.5 Opamp2.8 opamp_1.8 opamp_1.9 opamp_1.10 P2.2